# EAGLE board atmega328p PCB layout (EAGLE 9.6.2)
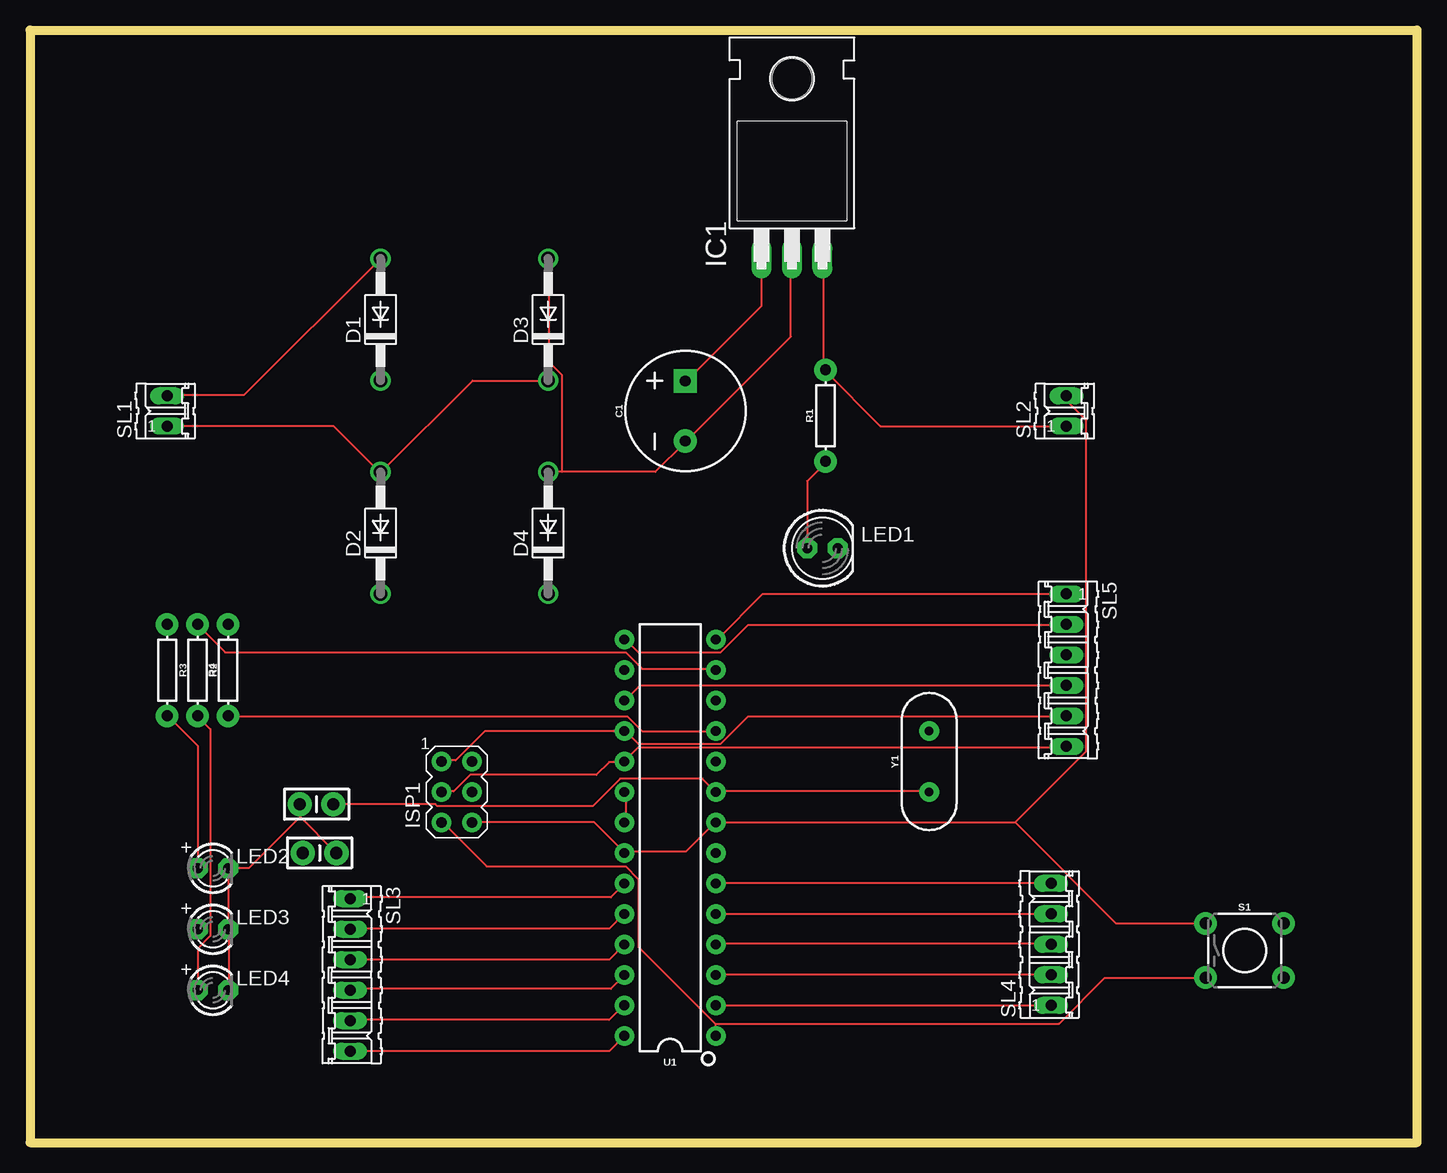
[diagram p0: board, top side]
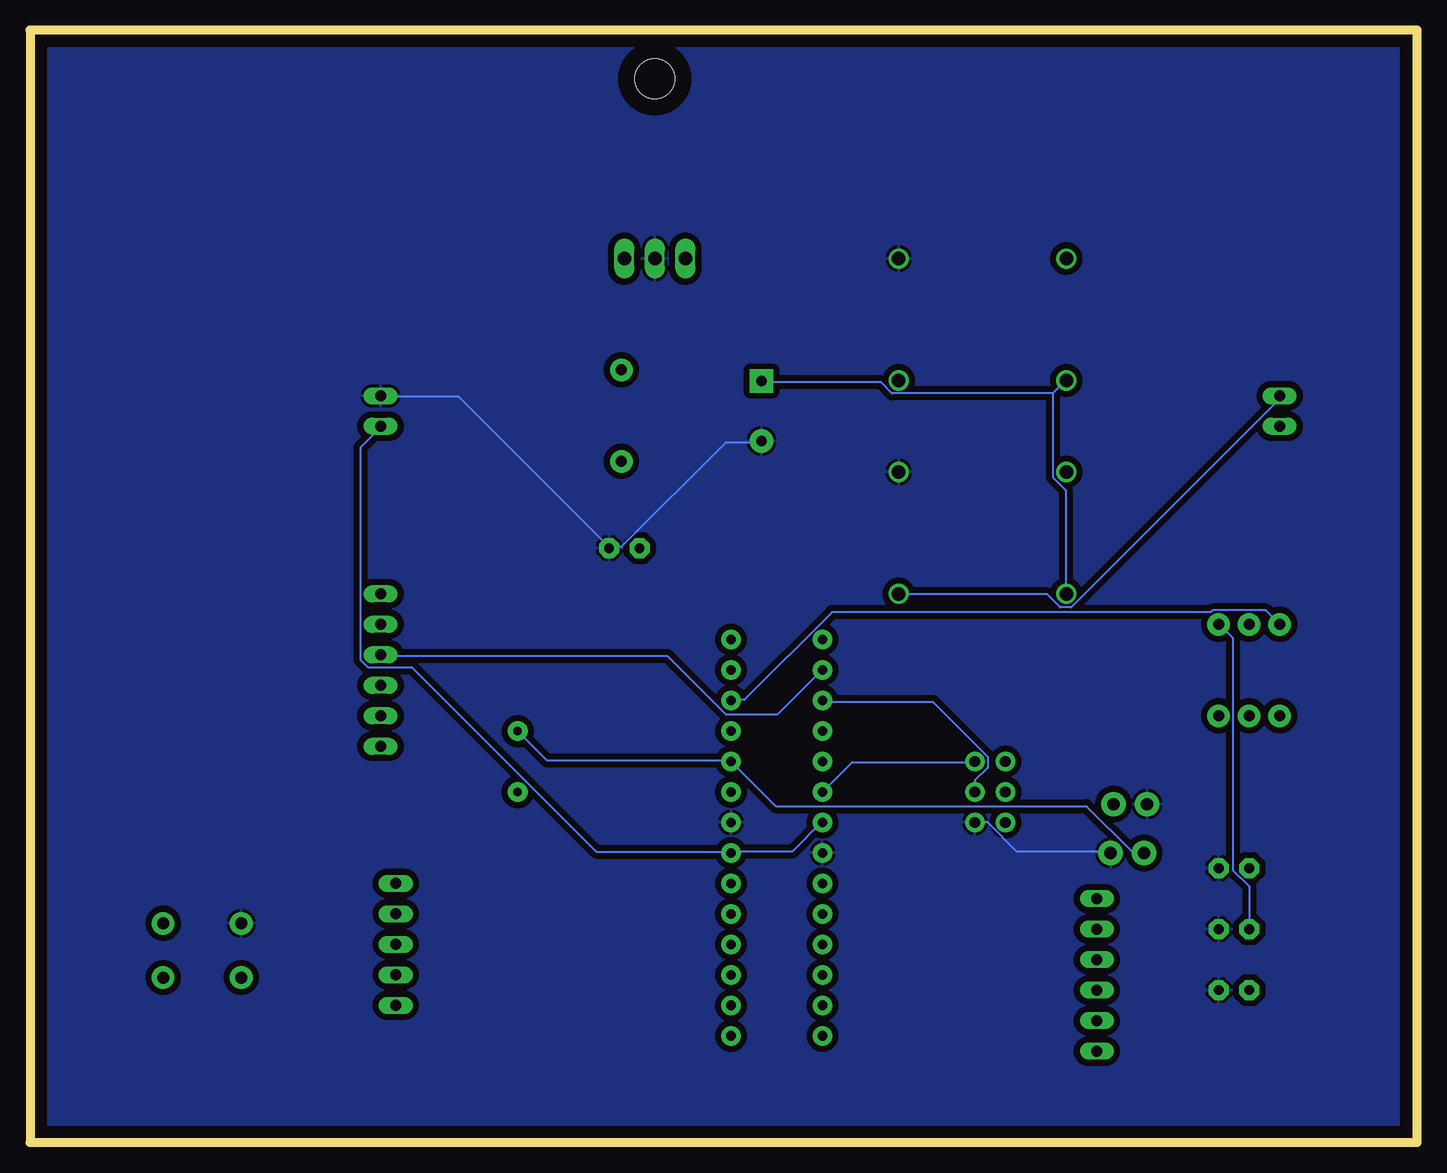
[diagram p1: board, bottom side, seen from below]

Size 115.57 x 92.71 mm. Coordinates in mm from the lower left corner, seen from the top.
Outline: 0,92.71 115.57,92.71 115.57,0 0,0 0,92.71
Copper layers (1*16): Top 0.035mm / dielectric 1.5mm / Bottom 0.035mm
Design rules "default": minimum track width 6mil, minimum drill 0.35mm, track to track 6mil, track to pad 6mil, pad to pad 6mil, via to via 6mil, smd to smd 6mil, copper to edge 40mil, drill to drill 6mil, minimum pad ring 10mil, minimum via ring 8mil, stop-mask expansion 4mil, vias tented up to drill 0mil, thermal gap 10mil

## Footprints (pad centres in the part's own frame; a part is rotated, then mirrored left to right if it is on the bottom)
CPOL-RADIAL-5MM-10MM = drill 0.9 pad 1.93 square: + 2.5,0 | drill 0.9 pad 1.93: - -2.5,0
CAP-PTH-SMALL-KIT = drill 1.016 pad 2.032: 1 -1.397,0; 2 1.397,0
DO41-10 = drill 1.118: A 5.08,0; C -5.08,0
TO220H = drill 1.118 long: 1 -2.54,-10.16; 2 0,-10.16; 3 2.54,-10.16 | hole 3.302: 0,4.826
AVRISP = drill 0.9 pad 1.626: 1 -1.27,2.54; 2 1.27,2.54; 3 -1.27,0; 4 1.27,0; 5 -1.27,-2.54; 6 1.27,-2.54
LED5MM = drill 0.813 pad 1.676 octagon: A -1.27,0; K 1.27,0
LED3MM = drill 0.813 pad 1.676 octagon: A -1.27,0; K 1.27,0
AXIAL-0.3 = drill 0.9 pad 1.88: P$1 -3.81,0; P$2 3.81,0
TACTILE_SWITCH_PTH_6.0MM = drill 1.016 pad 1.88: 1 -3.251,2.261; 2 3.251,2.261; 3 -3.251,-2.261; 4 3.251,-2.261
02P = drill 0.914 long: 1 -1.27,0; 2 1.27,0
06P = drill 0.914 long: 1 -6.35,0; 2 -3.81,0; 3 -1.27,0; 4 1.27,0; 5 3.81,0; 6 6.35,0
05P = drill 0.914 long: 1 -5.08,0; 2 -2.54,0; 3 0,0; 4 2.54,0; 5 5.08,0
DIP28 = drill 0.813 pad 1.626: 1 -16.51,-3.81; 2 -13.97,-3.81; 3 -11.43,-3.81; 4 -8.89,-3.81; 5 -6.35,-3.81; 6 -3.81,-3.81; 7 -1.27,-3.81; 8 1.27,-3.81; 9 3.81,-3.81; 10 6.35,-3.81; 11 8.89,-3.81; 12 11.43,-3.81; 13 13.97,-3.81; 14 16.51,-3.81; 15 16.51,3.81; 16 13.97,3.81; 17 11.43,3.81; 18 8.89,3.81; 19 6.35,3.81; 20 3.81,3.81; 21 1.27,3.81; 22 -1.27,3.81; 23 -3.81,3.81; 24 -6.35,3.81; 25 -8.89,3.81; 26 -11.43,3.81; 27 -13.97,3.81; 28 -16.51,3.81
HC49US = drill 0.7 pad 1.651: 1 -2.54,0; 2 2.54,0

## Placement (x,y rotation side)
C1  1mF  [CPOL-RADIAL-5MM-10MM]  54.61,60.96 90 top
C2  0.1uF  [CAP-PTH-SMALL-KIT]  23.88,28.19 180 top
C3  0.1uF  [CAP-PTH-SMALL-KIT]  24.13,24.13 0 top
D1  1N4004  [DO41-10]  29.21,68.58 90 top
D2  1N4004  [DO41-10]  29.21,50.8 90 top
D3  1N4004  [DO41-10]  43.18,68.58 90 top
D4  1N4004  [DO41-10]  43.18,50.8 90 top
FRAME1  FRAME-LETTERNO_PACKAGE  [DUMMY]  -13.97,53.34 0 top  (outside the outline)
IC1  7805T  [TO220H]  63.5,83.82 0 top
ISP1  AVRISP-6  [AVRISP]  35.56,29.21 0 top
LED1  [LED5MM]  66.04,49.53 0 top
LED2  [LED3MM]  15.24,22.86 0 top
LED3  [LED3MM]  15.24,17.78 0 top
LED4  [LED3MM]  15.24,12.7 0 top
R1  [AXIAL-0.3]  66.29,60.58 90 top
R2  [AXIAL-0.3]  13.97,39.37 270 top
R3  [AXIAL-0.3]  11.43,39.37 270 top
R4  [AXIAL-0.3]  16.51,39.37 90 top
S1  MOMENTARY-SWITCH-SPST-PTH-6.0MM  [TACTILE_SWITCH_PTH_6.0MM]  101.22,16 0 top
SL1  [02P]  11.43,60.96 90 top
SL2  [02P]  86.36,60.96 90 top
SL3  [06P]  26.67,13.97 270 top
SL4  [05P]  85.09,16.51 90 top
SL5  [06P]  86.36,39.37 270 top
U1  328P  [DIP28]  53.34,25.4 90 top
Y1  [HC49US]  74.93,31.75 90 top

## Library data of the parts
C1 = SparkFun-Capacitors; PROD_ID: CAP-09538
C2 C3 = SparkFun-Capacitors; PROD_ID: CAP-08370
D1-D4 = diode
FRAME1 = SparkFun-Aesthetics; DESIGNER: Nobody; VERSION: v01
IC1 ISP1 LED1-LED4 = adafruit
R1-R4 = SparkFun-Resistors
S1 = SparkFun-Switches; PROD_ID: SWCH-08441; SF_SKU: COM-00097
SL1-SL5 = con-amp-quick; OC_FARNELL: unknown; OC_NEWARK: unknown
U1 = SparkFun-IC-Microcontroller; PROD_ID: IC-09136
Y1 = SparkFun-Clocks

## Nets
GND: C1.- C2.2 C3.2 D3.A D4.A IC1.2 ISP1.6 LED1.K LED2.K LED3.K LED4.K S1.1 SL2.2 U1.8 U1.22
LED1: R4.P$1 U1.11
LED2: R3.P$1 U1.12
LED3: R2.P$1 U1.13
MISO: ISP1.1 SL5.5 U1.18
MOSI: ISP1.4 SL5.4 U1.17
N$1: C1.+ D1.C D2.C IC1.1
N$2: D1.A D4.C SL1.2
N$3: D2.A D3.C SL1.1
N$5: SL3.1 U1.23
N$6: LED1.A R1.P$1
N$7: LED4.A R2.P$2
N$8: LED2.A R3.P$2
N$9: LED3.A R4.P$2
N$10: SL3.2 U1.24
N$11: SL3.3 U1.25
N$12: SL3.4 U1.26
N$13: SL3.5 U1.27
N$14: SL3.6 U1.28
N$15: SL4.1 U1.2
N$16: SL4.2 U1.3
N$17: SL4.3 U1.4
N$18: SL4.4 U1.5
N$19: SL4.5 U1.6
N$20: SL5.1 U1.14
N$21: SL5.2 U1.15
N$22: SL5.3 U1.16
RST: ISP1.5 S1.3 U1.1
SCK: ISP1.3 SL5.6 U1.19
VCC: IC1.3 ISP1.2 R1.P$2 SL2.1 U1.7 U1.20 U1.21
XT1: C2.1 U1.9 Y1.1
XT2: C3.1 U1.10 Y1.2

## Tracks (layer width: path | path; a pad name or v marks a point on that pad's centre or on a via)
GND
  Top 0.152: 44.35,55.88 52.12,55.88 54.56,58.32 C1.- 54.71,58.47 63.4,67.16 63.4,73.56 IC1.2 | 44.35,55.88 D4.A | 44.35,55.88 44.35,63.96 43.28,65.02 43.28,73.56 D3.A | LED4.K 16.56,12.8 16.56,17.68 LED3.K 16.56,17.83 16.56,22.86 | 22.5,27.13 22.5,28.19 C2.2 | 22.5,27.13 25.4,24.23 C3.2 | 16.56,22.86 18.24,22.86 22.5,27.13 | 16.56,22.86 LED2.K | 82.09,26.67 90.47,18.29 97.94,18.29 S1.1 | 82.09,26.67 U1.8 57.1,26.67 54.66,24.23 49.63,24.23 U1.22 49.48,24.23 47.04,26.67 ISP1.6 | SL2.2 86.36,61.87 88.04,60.2 88.04,32.61 82.09,26.67
  Bottom 0.152: SL2.2 86.26,62.13 79.86,62.13 67.36,49.63 LED1.K 67.21,49.63 66.29,49.63 57.61,58.32 54.71,58.32 C1.- | ISP1.6 35.76,26.67 33.33,24.23 25.55,24.23 C3.2
  pour Bottom (isolate 0.508): 1.27,91.44 1.27,1.27 114.3,1.27 114.3,91.44
LED1
  Top 0.152: U1.11 51,34.29 49.78,35.51 16.56,35.51 R4.P$1
LED2
  Bottom 0.152: R3.P$1 12.6,44.35 17.02,44.35 17.17,44.2 48.72,44.2 56.03,36.88 57.1,36.88 U1.12
LED3
  Top 0.152: U1.13 57.1,39.47 51,39.47 49.63,40.84 16.26,40.84 13.97,43.13 R2.P$1
MISO
  Top 0.152: SL5.5 86.36,35.51 59.84,35.51 57.56,33.22 50.7,33.22 49.63,34.29 U1.18 37.9,34.29 35.46,31.85 34.39,31.85 ISP1.1
MOSI
  Top 0.152: SL5.4 50.85,38.1 49.63,36.88 U1.17
  Bottom 0.152: ISP1.4 36.83,30.18 35.76,31.24 35.76,32.16 40.34,36.73 49.48,36.73 U1.17
N$1
  Top 0.152: IC1.1 60.96,69.75 54.71,63.5 C1.+
  Bottom 0.152: 30.33,62.43 30.33,55.42 29.26,54.36 29.26,45.82 D2.C | 30.33,62.43 29.26,63.5 D1.C | 30.33,62.43 43.74,62.43 44.65,63.35 54.56,63.35 C1.+
N$2
  Top 0.152: D1.A 17.83,62.28 11.43,62.28 SL1.2
  Bottom 0.152: SL1.2 11.43,61.98 28.8,44.6 29.72,44.6 30.79,45.67 43.13,45.67 D4.C
N$3
  Top 0.152: SL1.1 25.3,59.69 29.11,55.88 D2.A 29.26,55.88 36.88,63.5 D3.C
N$5
  Top 0.152: SL3.1 26.77,20.42 48.41,20.42 49.48,21.49 U1.23
N$6
  Top 0.152: LED1.A 64.77,55.12 66.29,56.64 R1.P$1
N$7
  Top 0.152: LED4.A 13.97,16.15 15.04,17.22 15.04,34.44 13.97,35.51 R2.P$2
N$8
  Top 0.152: LED2.A 13.97,33.07 11.53,35.51 R3.P$2
N$9
  Bottom 0.152: LED3.A 13.97,21.34 15.34,22.71 15.34,42.06 16.41,43.13 R4.P$2
N$10
  Top 0.152: SL3.2 26.77,17.83 48.26,17.83 49.48,19.05 U1.24
N$11
  Top 0.152: SL3.3 48.26,15.24 U1.25
N$12
  Top 0.152: SL3.4 26.77,12.8 48.41,12.8 49.48,13.87 U1.26
N$13
  Top 0.152: SL3.5 26.77,10.21 48.26,10.21 49.48,11.43 U1.27
N$14
  Top 0.152: SL3.6 48.26,7.62 U1.28
N$15
  Top 0.152: U1.2 SL4.1
N$16
  Top 0.152: SL4.2 84.99,14.02 57.25,14.02 U1.3
N$17
  Top 0.152: SL4.3 84.99,16.61 57.25,16.61 U1.4
N$18
  Top 0.152: U1.5 SL4.4
N$19
  Top 0.152: SL4.5 84.99,21.64 57.25,21.64 U1.6
N$20
  Top 0.152: SL5.1 61.06,45.72 57.25,41.91 U1.14
N$21
  Top 0.152: SL5.2 86.36,43.13 59.84,43.13 57.56,40.84 50.7,40.84 49.63,41.91 U1.15
N$22
  Bottom 0.152: SL5.3 86.36,40.54 62.43,40.54 57.56,35.66 53.29,35.66 49.63,39.32 U1.16
RST
  Top 0.152: 57.1,9.91 57.1,8.99 U1.1 | 57.1,9.91 50.7,16.31 50.7,21.95 49.63,23.01 38.05,23.01 34.39,26.67 ISP1.5 | 57.1,9.91 85.75,9.91 89.56,13.72 97.94,13.72 S1.3
SCK
  Top 0.152: SL5.6 86.36,32.92 50.7,32.92 U1.19 49.48,31.7 48.26,31.7 47.19,30.63 36.68,30.63 35.31,29.26 34.39,29.26 ISP1.3
VCC
  Top 0.152: SL2.1 70.87,59.69 66.29,64.26 R1.P$2 66.29,64.41 66.14,64.57 66.14,73.56 IC1.3 | U1.21 49.63,26.67 49.63,29.11 U1.20
  Bottom 0.152: U1.21 49.63,26.67 52.07,24.23 57.1,24.23 U1.7 57.25,24.23 68.38,24.23 83.77,39.62 87.43,39.62 88.04,40.23 88.04,57.91 86.36,59.59 SL2.1 | U1.20 47.04,31.7 36.83,31.7 ISP1.2
XT1
  Top 0.152: Y1.1 74.93,29.26 57.25,29.26 U1.9 56.03,30.33 49.17,30.33 46.89,28.04 33.93,28.04 33.78,28.19 C2.1
XT2
  Bottom 0.152: Y1.2 72.49,31.85 57.25,31.85 U1.10 53.44,28.04 27.53,28.04 23.72,24.23 22.81,24.23 C3.1